# Altium PCB RGBReceiverRF.PcbDoc
Units mil, origin at the board's own origin, x right, y up, seen from the top; angles counter-clockwise.
Board outline 984.25 x 1377.95 mil, 2 copper layers (Top Layer, Bottom Layer), stack 61.855 mil thick; 18 components, 16 nets, 57 pads, 21 vias.
Unrouted connection lines stored in the file: 2.
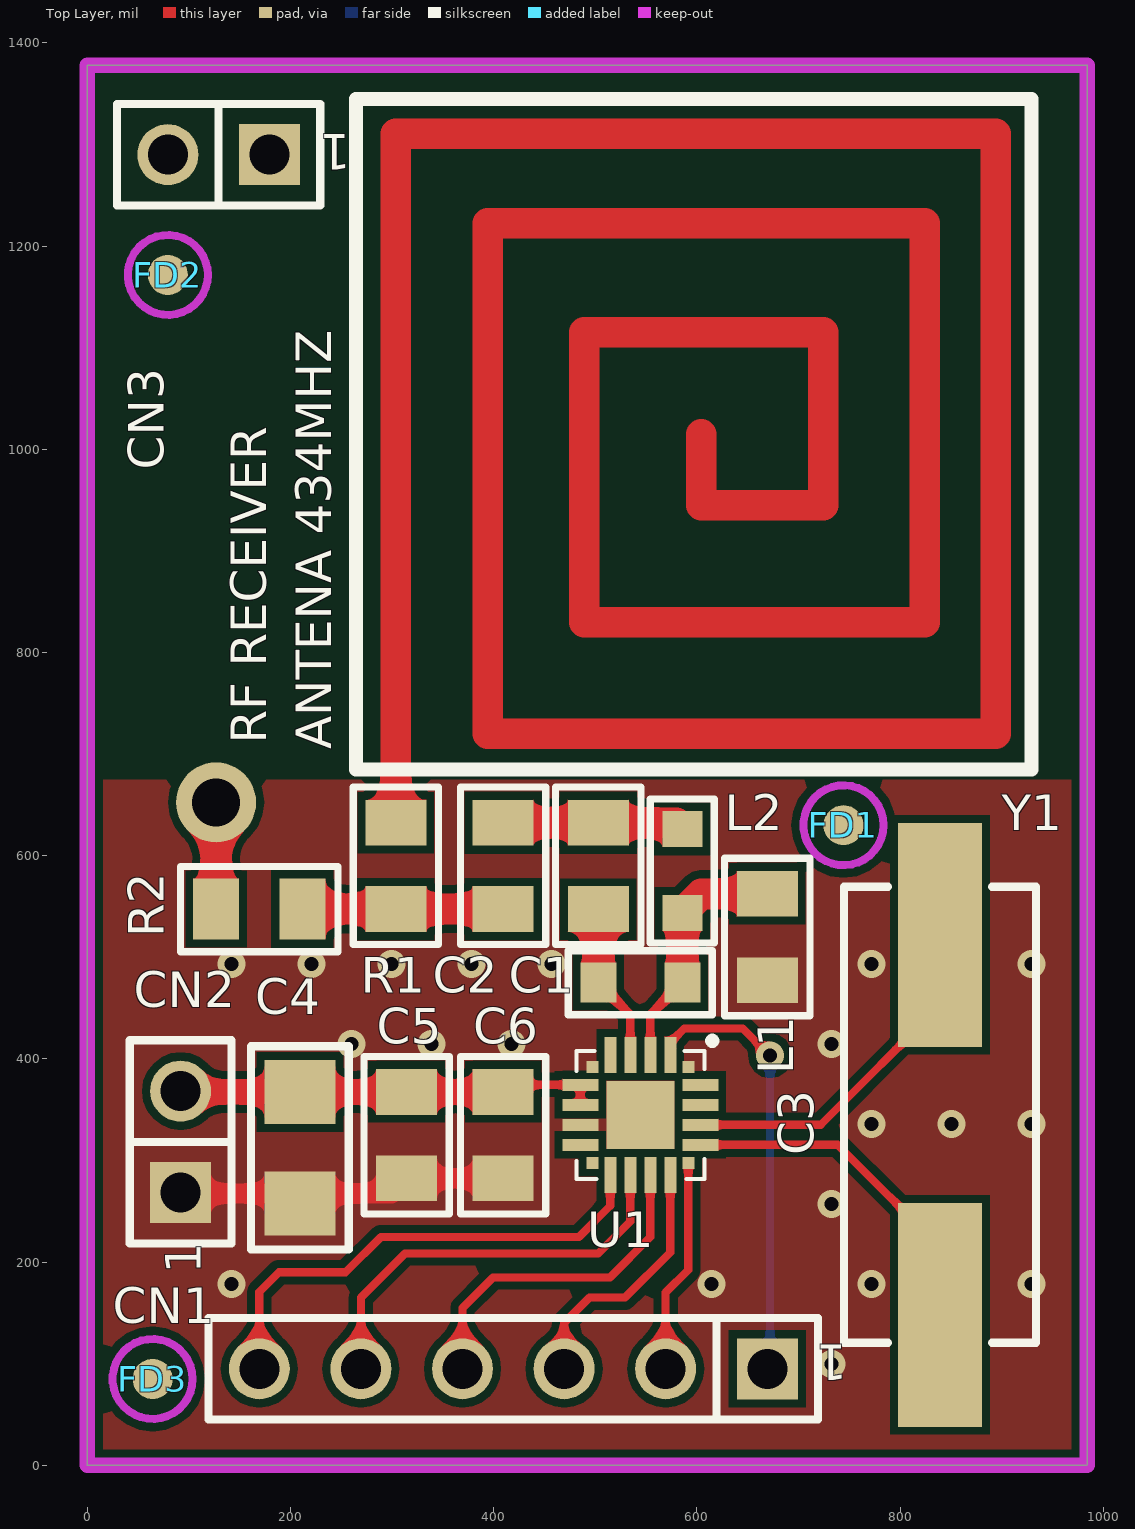
[diagram p0: Top Layer view]
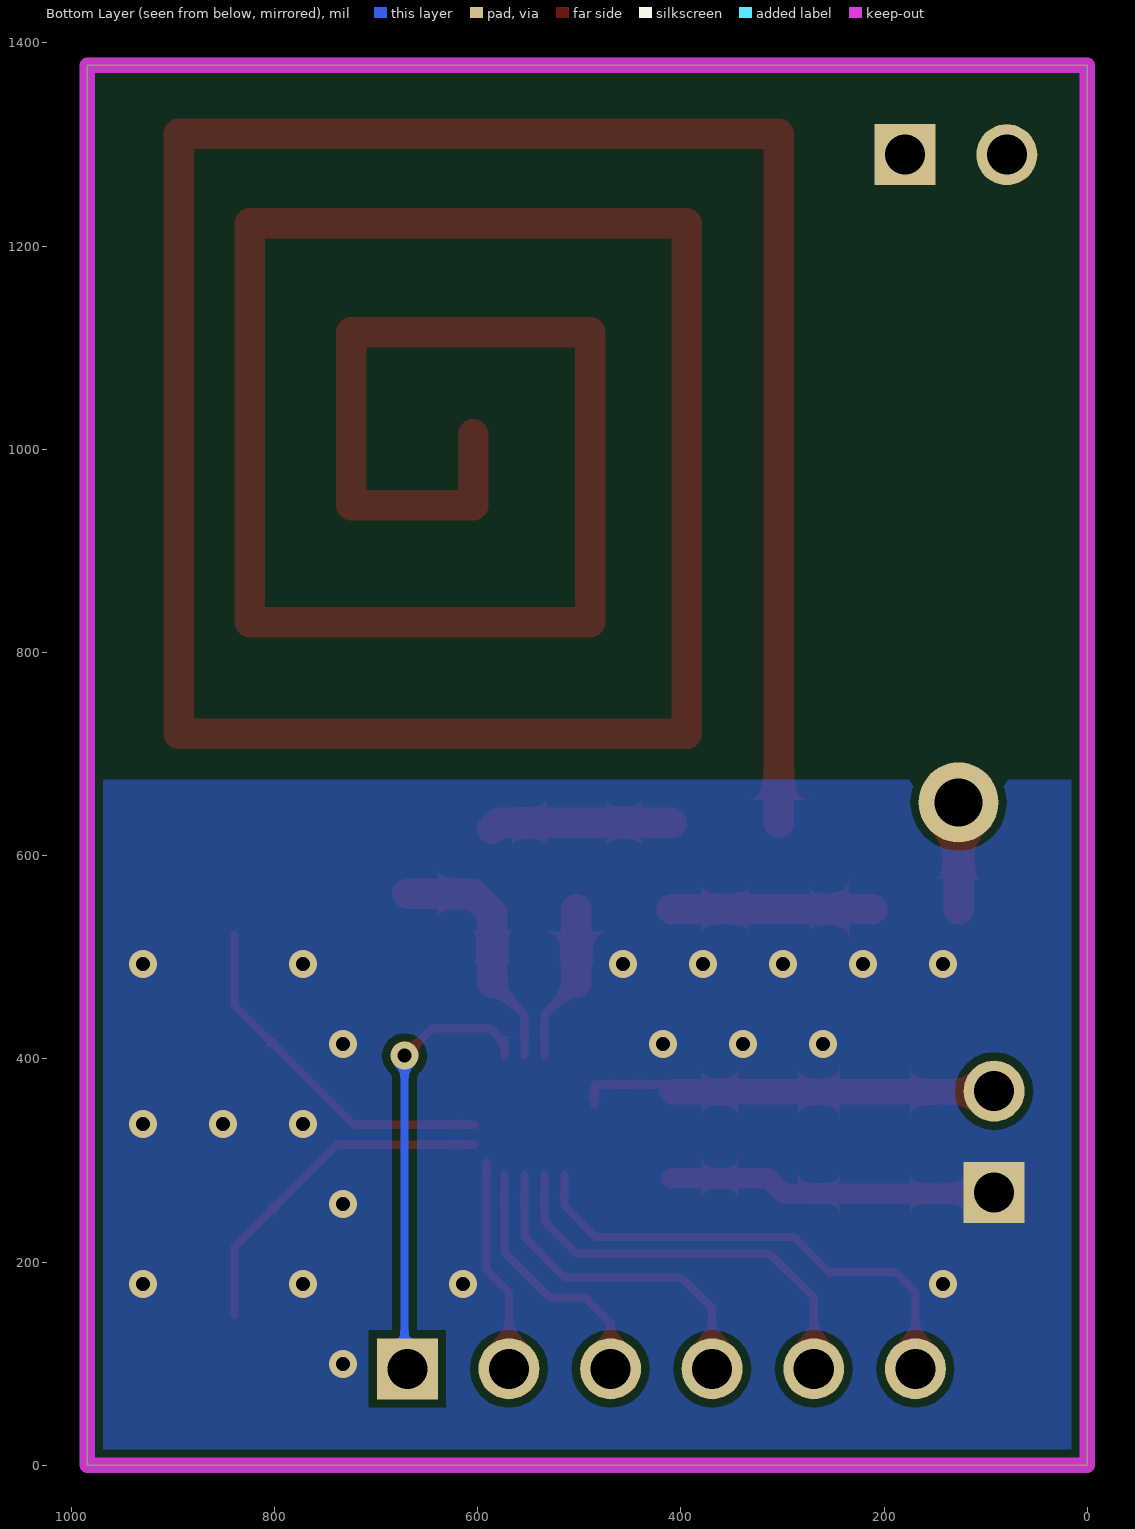
[diagram p1: Bottom Layer view, seen from below]
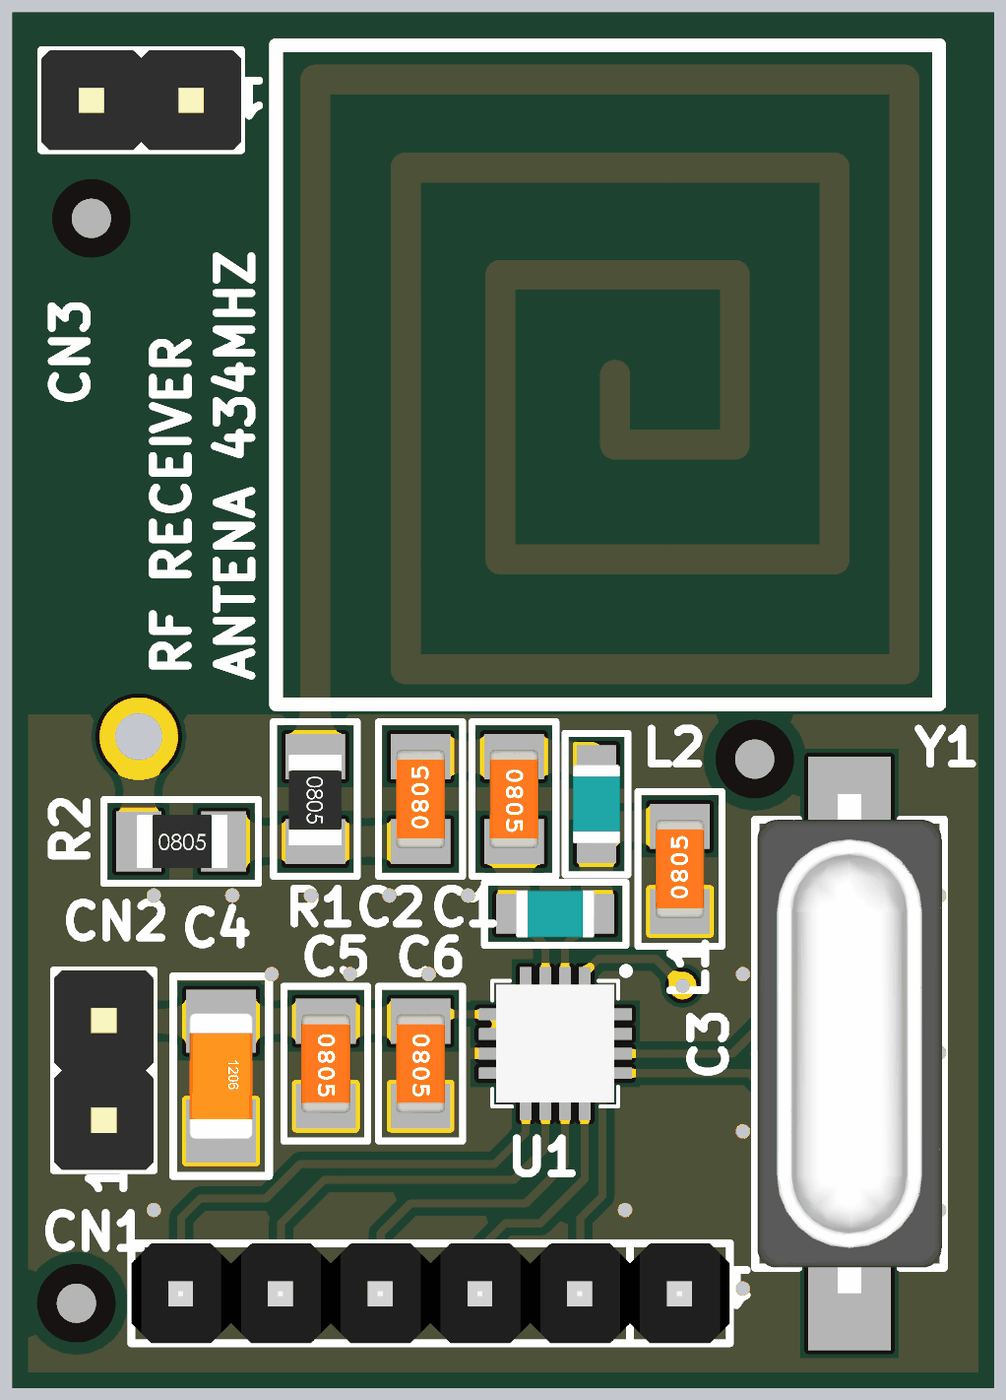
[diagram p2: 3D render of the assembled board from above, using the file's embedded part models]

## Layer stack, top to bottom
Top Solder: solder mask 0.4, Solder Resist, Dk 3.5
Top Layer: signal copper 1.4
Dielectric 1: dielectric 59.0551, FR-4, Dk 4.8
Bottom Layer: signal copper 1.4
Bottom Solder: solder mask 0.4, Solder Resist, Dk 3.5

## Board outline
0,0 0,1377.95 984.25,1377.95 984.25,0

## Design rules (kind name [scope] priority, off if disabled: settings)
Clearance [All] p1: gap=8
MinimumSolderMaskSliver [All] p1: minsoldermaskwidth=1
PlaneConnect [All] p1: planeconnectstyle=Direct reliefexpansion=20 reliefentries=4 reliefconductorwidth=10 reliefairgap=10
PolygonConnect [All] p1: connectstyle=Direct reliefconductorwidth=10 reliefentries=4 polygonreliefangle="90 Angle" airgapwidth=10
RoutingVias [All] p1: holewidth=28 width=50 viastyle="Through Hole" minholewidth=28 minwidth=50 maxholewidth=28 maxwidth=50
SilkToSilkClearance [All] p1: silktosilkclearance=1
SilkToSolderMaskClearance [IsPad] p1: minsilkscreentomaskgap=1 clearancetoexposedcopper=TRUE
SolderMaskExpansion [All] p1: expansion=4
UnpouredPolygon [All] p1: allowunpoured=FALSE
Width [All] p1: maxlimit=100 minlimit=8 preferedwidth=10
25 further rules are at their usual default settings.

## Components (designator, comment, footprint, x,y, rotation, side; value= is the part's Value field where it differs from the comment)
C1 "2.7pF 50V" C0805 502.91,590 r270 top
C2 "270pF 50V" C0805 409.25,590 r90 top
C3 "5.1pF 50V" C0805 669.25,520 r90 top
C4 "2,2uF 25V" C1206 209.25,312.5 r270 top
C5 "100nF 50V" C0805 314.25,325 r270 top
C6 "33pF 50V" C0805 409.25,325 r270 top
CN1 "CON BARRA 1x6 180 MACHO PTH" BARRA6PM180 669.25,95 r180 top
CN2 "CON BARRA 1x2 180 MACHO PTH" BARRA2PM180 91.75,268.35 r90 top
CN3 "CON BARRA 1x2 180 MACHO PTH" BARRA2PM180 179.25,1290 r180 top
FD1 "Fiducial" Fiducial 744.25,630 r0 top
FD2 "Fiducial" Fiducial 79.25,1171.64 r0 top
FD3 "Fiducial" Fiducial 64.25,85 r0 top
L1 "56nH" I0805 544.25,475 r180 top
L2 "56nH" I0805 585.59,585 r90 top
R1 "0R 1%" R0805 303.7,590 r270 top
R2 "0R 1%" R0805 169.25,547.5 r0 top
U1 "CI Si4355 QFN20" "QFN20 3X3" 544.25,345 r270 top
Y1 "30MHz" "ABLS SMD" 839.25,335.16 r270 top

## Footprints (in the part's own frame and the unit in brackets; to place one, negate y for a bottom-side part, rotate by r counter-clockwise, add the part's x,y. Pads: shape width x height; smd on the part's side, far side on the other; paste and mask are expansions set on the pad)
"ABLS SMD" [mm]
  rect 5.6x2.1 smd: 1(-4.75,0) 2(4.75,0)
  silkscreen extent -5.95,-2.4 5.45,2.4, body extent -6.6,-2.35 6.1,2.35, height 4.2
BARRA2PM180 [mil]
  rect 60x60 hole 39.4: 1(0,0)
  round 60 hole 39.4: 2(100,0)
  silkscreen extent -50,-50 150,50, body extent -50,-50 150,50, height 336
BARRA6PM180 [mil]
  rect 60x60 hole 39.4: 1(0,0)
  round 60 hole 39.4: 2(100,0) 3(200,0) 4(300,0) 5(400,0) 6(500,0)
  silkscreen extent -50,-50 550,50, body extent -50,-50 550,50, height 330
C0805 [mil]
  rect 45x60 smd: 1(-42.5,0) 2(42.5,0)
  silkscreen extent -78,-42 78,42, body extent -49,-24 49,25, height 31
C1206 [mil]
  rect 63x70 smd: 1(-55,0) 2(55,0)
  silkscreen extent -100,-48 100,48, body extent -63,-31 63,32, height 39
Fiducial [mm]
  round 1 smd mask+0.5: 1(0,0)
  Top Layer keep-out circle w0.2: c0,0 r1
I0805 [mm]
  rect 0.9x1 smd: 1(-1.05,0) 2(1.05,0)
  silkscreen extent -1.8,-0.8 1.8,0.8, body extent -1,-0.6 1,0.6, height 1
"QFN20 3X3" [mm] "QFN20 3X3"
  rect 0.3x0.3 smd: 1(-1.2,1.2) 6(-1.2,-1.2) 11(1.2,-1.2) 16(1.2,1.2)
  rect 0.9x0.3 smd: 2(-1.5,0.75) 3(-1.5,0.25) 4(-1.5,-0.25) 5(-1.5,-0.75) 12(1.5,-0.75) 13(1.5,-0.25) 14(1.5,0.25) 15(1.5,0.75)
  rect 0.3x0.9 smd: 7(-0.75,-1.5) 8(-0.25,-1.5) 9(0.25,-1.5) 10(0.75,-1.5) 17(0.75,1.5) 18(0.25,1.5) 19(-0.25,1.5) 20(-0.75,1.5)
  rect 1.7x1.7 smd: EP(0,0)
  silkscreen extent -1.9,-1.6 1.6,1.85, body extent -1.5,-1.5 1.5,1.5, height 0.62
R0805 [mil]
  rect 45x60 smd: 1(-42.5,0) 2(42.5,0)
  silkscreen extent -78,-42 78,42, body extent -44,-27 46,27, height 34

## Part data
C1: library part "CC 2.7pF 50V 0805"
C2: library part "CC 270pF 50V 0805"
C3: library part "CC 5.1pF 50V 0805"
C4: library part "CC 2,2uF 25V 1206"
C5: library part "CC 100nF 50V 0805"
C6: library part "CC 33pF 50V 0805"
CN1: "Barra de pinos simples 1x6 180g. 2,54mm"
CN2 CN3: "Barra de pinos simples 1x2 180g. 2,54mm"
L1 L2: library part "IND 56nH 0805 SMD", "IND 56nH 0805 SMD"
R1 R2: library part "RES 0R 1% 0805", "RES 0R 1% 0805"
Y1: library part "XTAL 30MHZ ABLS-SMC", "XTAL 30MHZ ABLS-SMC"

## Free pads (board coordinates)
  round 78.74 hole 47.24: 0(126.75,652.5)

## Via types
v1: diameter 27.56, hole 13.78, Top Layer to Bottom Layer, tented both sides, 20 vias
v2: diameter 27.56, hole 13.78, Top Layer to Bottom Layer, 1 vias

## Nets (pads, with @x,y where several pads share a name; then routed paths per layer and width w, separated by ;. In a path a pad name is that pad's centre, name@x,y a point inside that pad or via, vN(x,y) a via of type N, cw(c..) or ccw(c..) an arc to the next point about the centre after c; other vN are vias at no path point)
ANTENNA: R1.1 | length 4899.2
  Top Layer w30: R1.1 303.7,1310.55 894.25,1310.55 894.25,720 394.25,720 394.25,1222.5 824.25,1222.5 824.25,830 489.25,830 489.25,1115 724.25,1115 724.25,945 604.25,945 604.25,1015
EXT.ANTENNA: pad.0 R2.1 | length 105
  Top Layer w30: R2.1 pad.0
GND: C3.1 C4.2 C5.2 C6.2 CN2.1 CN3.1 CN3.2 U1.1 U1.6 U1.9 U1.EP | length 321.2
  Top Layer w20: CN2.1@94.25,267.5 299.25,267.5 C5.2 C6.2
  other v1: 732.37,99.69 141.81,178.43 614.26,178.43 771.74,178.43 929.22,178.43 732.37,257.17 771.74,335.91 850.48,335.91 929.22,335.91 259.92,414.65 338.66,414.65 417.4,414.65 732.37,414.65 141.81,493.39 220.55,493.39 299.29,493.39 378.03,493.39 456.77,493.39 771.74,493.39 929.22,493.39
NetC1_1: C1.1 C2.2 L2.2 | length 178.9
  Top Layer w30: C2.2 C1.1 579.43,632.5 L2.2
NetC2_1: C2.1 R1.2 R2.2 | length 197.5
  Top Layer w30: R2.2 R1.2 C2.1
NetU1_17: U1.17 Y1.2 | length 344.3
  Top Layer w8: U1.17 738.5,315.47 839.25,214.72 Y1.2
NetU1_18: U1.18 Y1.1 | length 354.2
  Top Layer w8: U1.18 721.91,335.16 839.25,452.5 Y1.1
NIRQ: CN1.6 U1.12 | length 486.8
  Top Layer w8: CN1.6 169.25,170.72 188.53,190 254.25,190 288.89,224.64 483.89,224.64 514.72,255.47 U1.12
NSEL: CN1.2 U1.16 | length 212
  Top Layer w8: CN1.2 569.25,170 591.5,192.24 U1.16
RXN: C1.2 L1.2 U1.4 | length 156.5
  Top Layer w8: L1.2 534.41,443.5 U1.4
  Top Layer w30: L1.2 C1.2
RXP: C3.2 L1.1 L2.1 U1.3 | length 244.1
  Top Layer w8: U1.3 554.1,443.5 L1.1
  Top Layer w30: L1.1 L2.1 604.43,562.5 C3.2
SCLK: CN1.5 U1.13 | length 412.1
  Top Layer w8: CN1.5 269.25,165 312.84,208.58 502.84,208.58 534.41,240.16 U1.13
SDI: CN1.3 U1.15 | length 254.7
  Top Layer w8: CN1.3 469.25,140 494.25,165 529.25,165 573.78,209.53 U1.15
SDN: CN1.1 U1.2 | length 436.5
  Top Layer w8: U1.2 573.78,416.22 587.56,430 645.13,430 v2(672.01,403.12)
  Bottom Layer w8: CN1.1 672.01,97.76 v2(672.01,403.12)
SDO: CN1.4 U1.14 | length 335
  Top Layer w8: CN1.4 369.25,155 399.25,185 514.41,185 554.09,224.69 U1.14
VCC: C4.1 C5.1 C6.1 CN2.2 U1.7 U1.8 | length 413.5
  Top Layer w8: C6.1 416.28,374.53 U1.7 U1.8
  Top Layer w25: CN2.2@94.25,367.5 C4.1 C5.1 C6.1
pads on no net: FD1.1 FD2.1 FD3.1 U1.5 U1.10 U1.11 U1.19 U1.20

## Polygon pours and split planes (outlines as drawn)
GND on Bottom Layer "Keep-Out Layer-No Net" (solid, remove dead copper, pour order 3): 0,675 984.25,675 984.25,0 0,0
GND on Top Layer "Keep-Out Layer-No Net" (solid, remove dead copper, pour order 3): 0,675 984.25,675 984.25,0 0,0

## Keep-outs
Keep-Out Layer:
  the board outline again, w15

## Silkscreen, mask and mechanical layers (free items; w line width, h text height)
Top Overlay:
  lines w13.78: 264.25,685 264.25,1345 929.25,1345 929.25,685 264.25,685
  text "RF RECEIVER" at 176.25,710 h35 r90
  text "ANTENA 434MHZ" at 240,705 h35 r90
Board Outline:
  the board outline again, w30

## Text inside footprints (layer, text, board x,y; h text height)
CN1: Top Overlay "1" at 747.99,118.62 h35 r180
CN2: Top Overlay "1" at 111.75,188.35 h35 r90
CN3: Top Overlay "1" at 259.25,1310 h35 r180